# Altium PCB ActuatorCan.PcbDoc
Units mil, origin at the board's own origin, x right, y up, seen from the top; angles counter-clockwise.
Board outline 2415 x 2010 mil, 2 copper layers (Top Layer, Bottom Layer); 65 components, 42 nets, 279 pads, 32 vias.
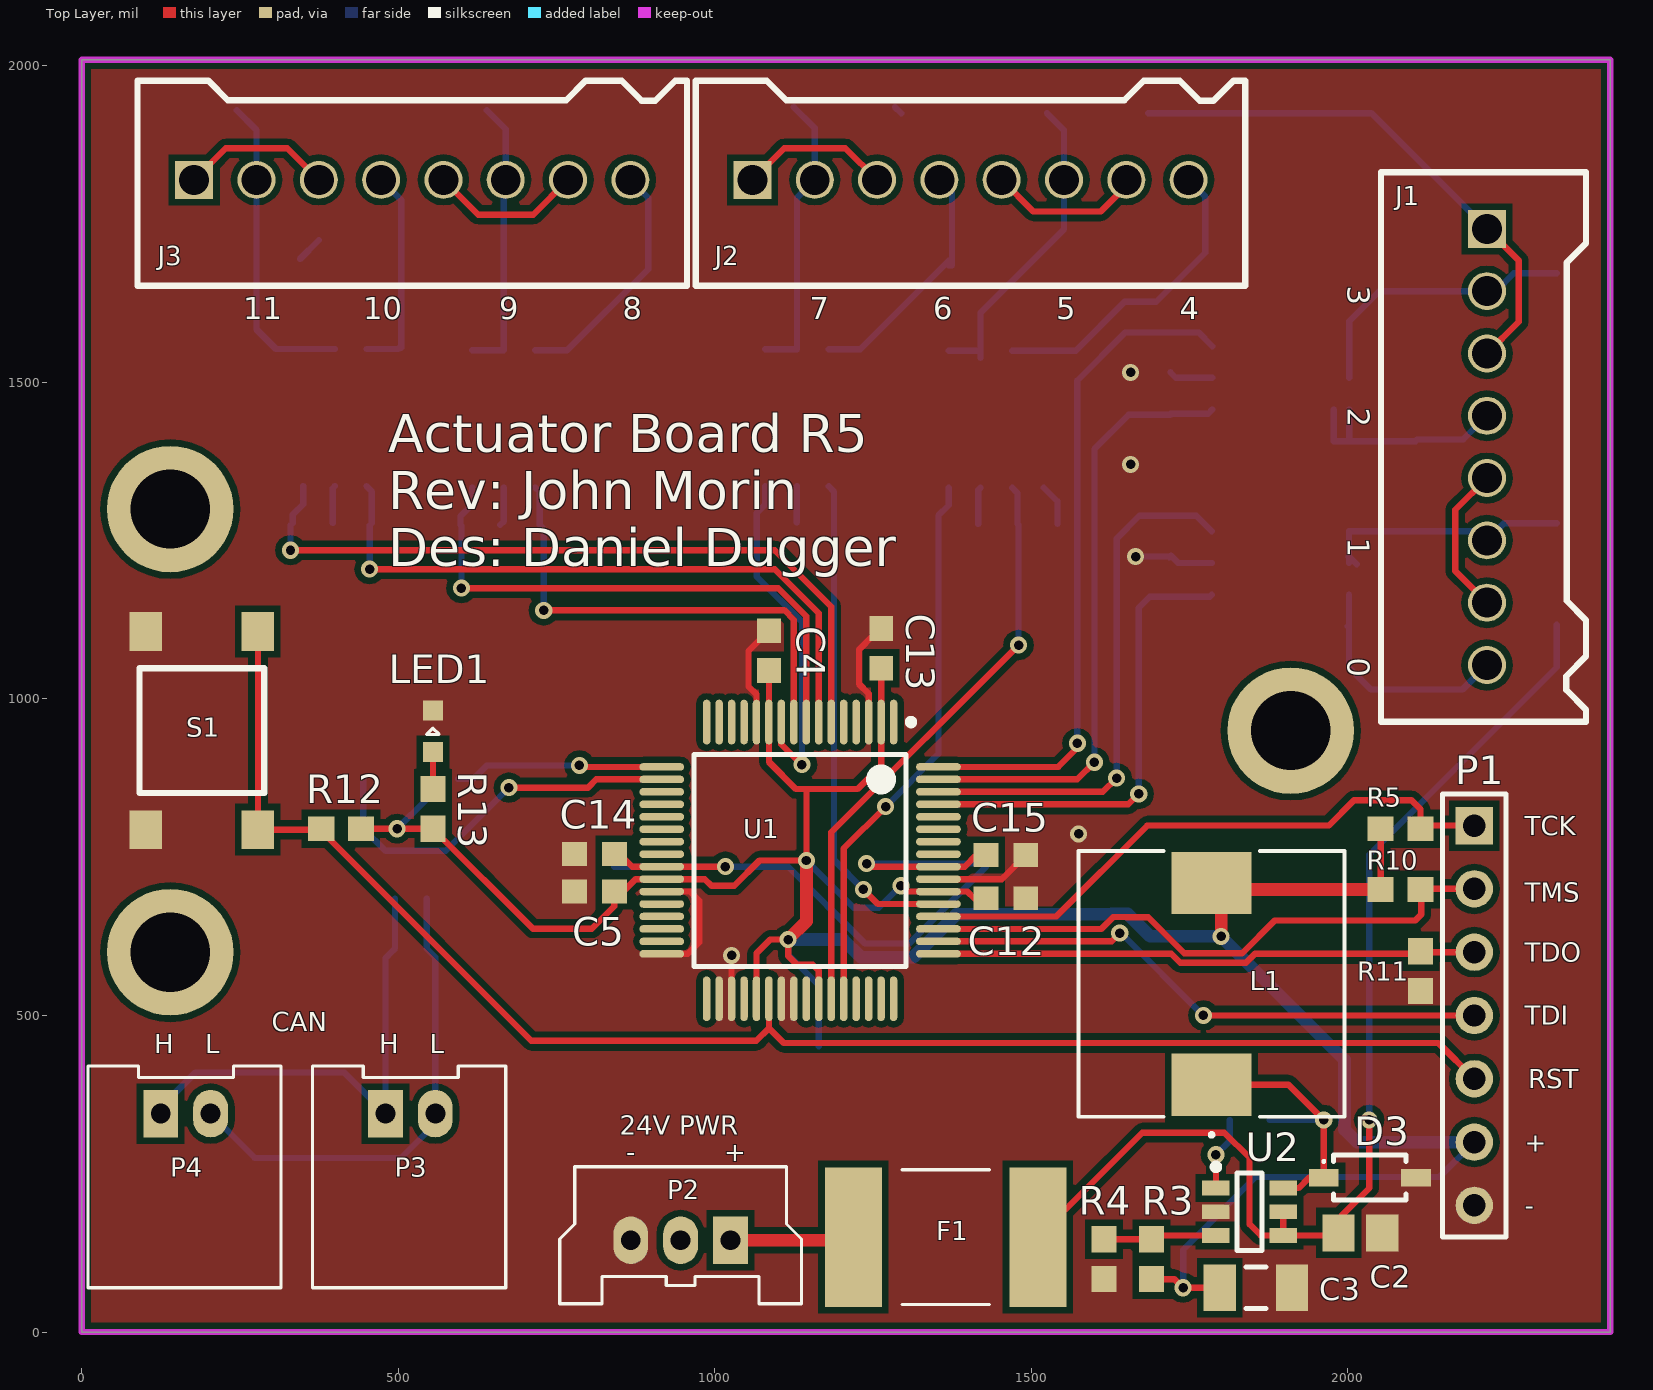
[diagram p0: Top Layer view]
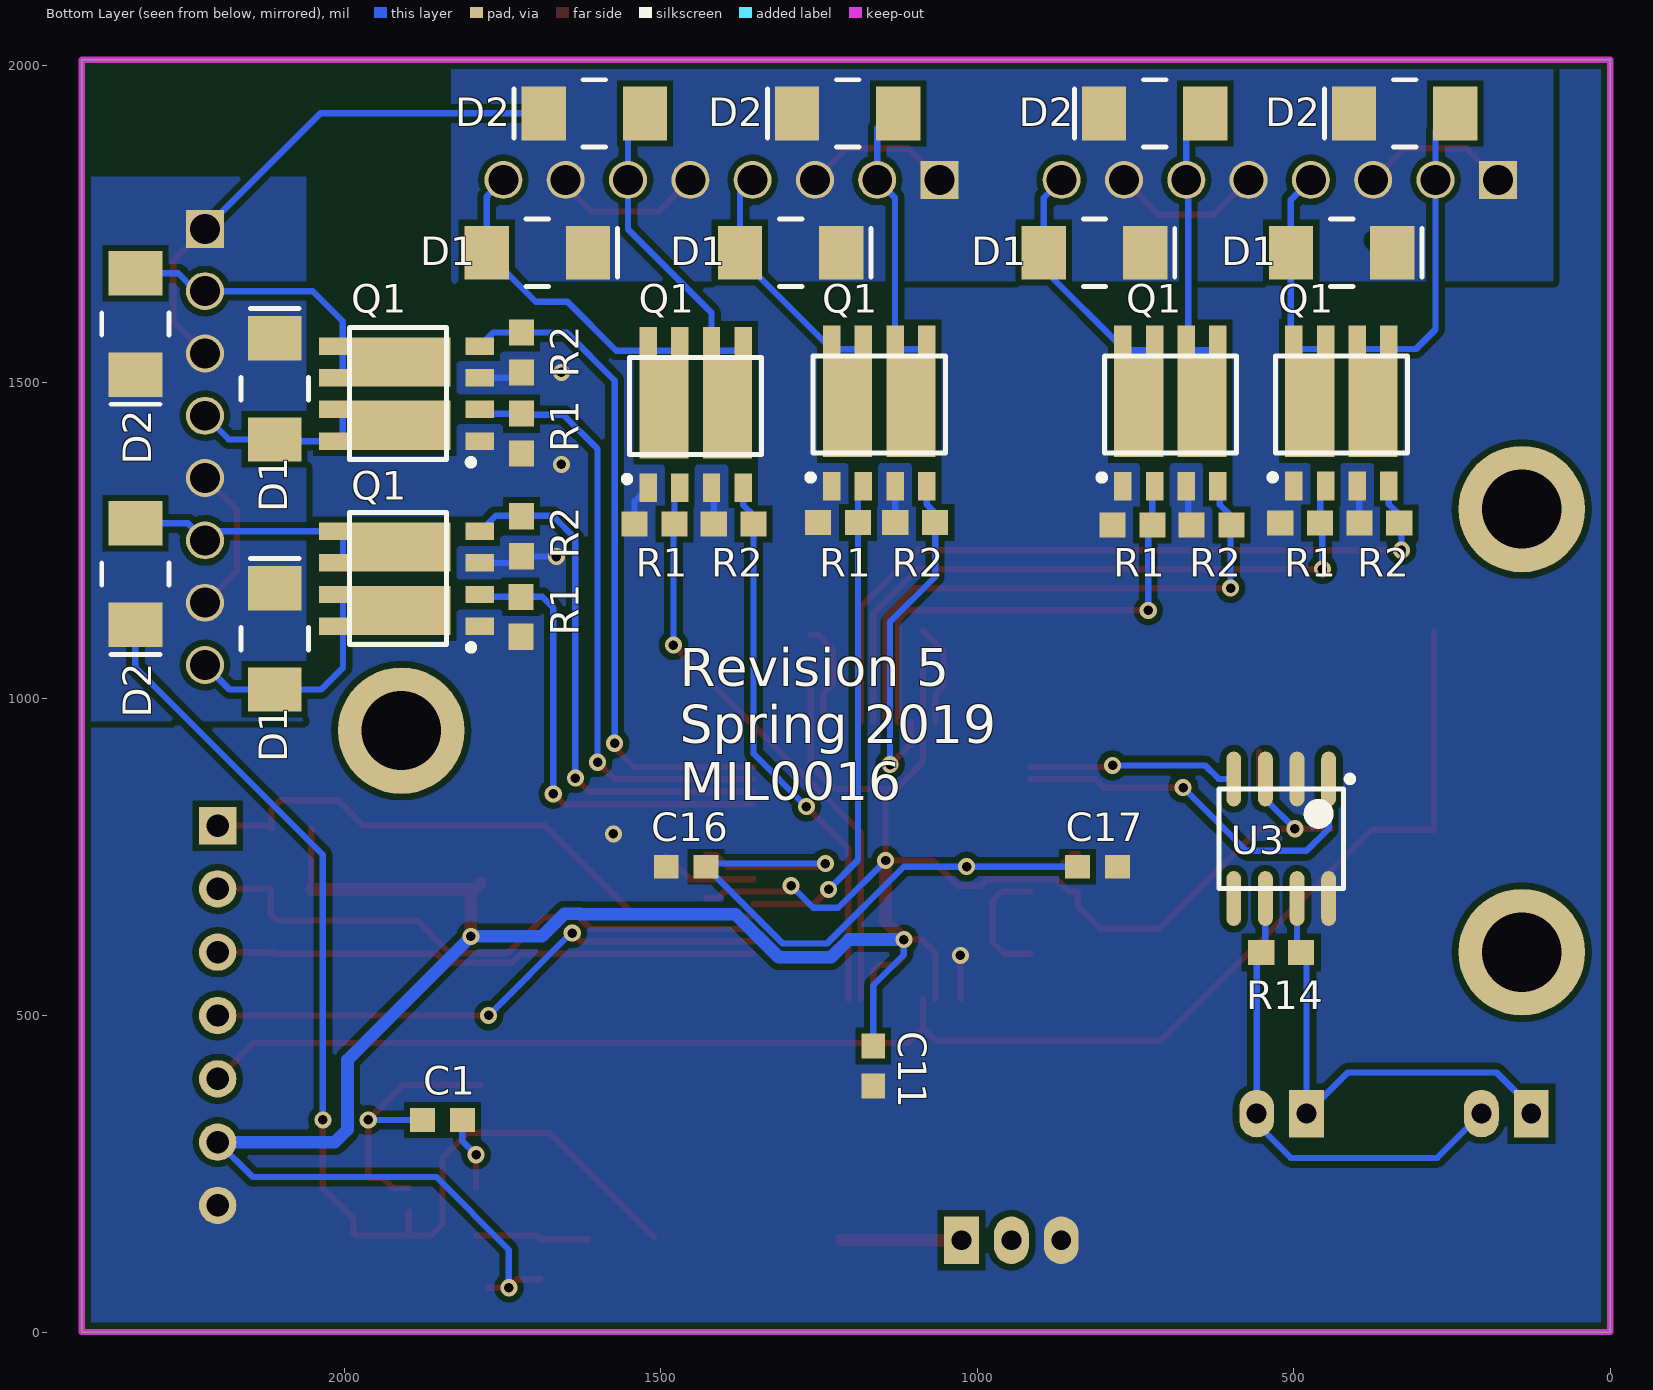
[diagram p1: Bottom Layer view, seen from below]

## Layer stack, top to bottom
Top Solder: solder mask 0.4, Solder Resist, Dk 3.5
Top Layer: signal copper 1.4
Dielectric 1: dielectric 12.6, FR-4, Dk 4.8
Bottom Layer: signal copper 1.4
Bottom Solder: solder mask 0.4, Solder Resist, Dk 3.5

## Board outline
0,0 0,2010 2415,2010 2415,0

## Design rules (kind name [scope] priority, off if disabled: settings)
Clearance [All] p1: gap=10 ignorepadtopadclearanceinfootprint=FALSE except(0: Arc-Hole Track-Hole SMDPad-Hole THPad-Hole Via-Hole Fill-Hole Poly-Hole Region-Hole Text-Hole; 5: Track-Track Track-SMDPad SMDPad-SMDPad; 7: Track-Via)
HoleSize [All] p1: absolutevalues=TRUE maxlimit=150 minlimit=10 maxpercent=80.000 minpercent=20.000
MinimumAnnularRing [All] p1: minimumring=7
MinimumSolderMaskSliver [All] p1: minsoldermaskwidth=1
PolygonConnect [All] p1: connectstyle=Direct reliefconductorwidth=10 reliefentries=4 polygonreliefangle="90 Angle" airgapwidth=10
RoutingVias [All] p1: holewidth=10 width=22 viastyle="Through Hole" minholewidth=10 minwidth=22 maxholewidth=100 maxwidth=150
SilkToSolderMaskClearance [IsPad] p1: minsilkscreentomaskgap=5 clearancetoexposedcopper=TRUE
SolderMaskExpansion [All] p1: expansion=4
Width [All] p1: maxlimit=150 minlimit=8 preferedwidth=10
27 further rules are at their usual default settings.

## Classes and differential pairs
channel class DualDriver: H1 H2 H3 H4 H5 H6
component class H6: D1 D2 Q1 R1 R2
component class H5: D1 D2 Q1 R1 R2
component class H4: D1 D2 Q1 R1 R2
component class H3: D1 D2 Q1 R1 R2
component class H2: D1 D2 Q1 R1 R2
component class H1: D1 D2 Q1 R1 R2
component class ActuatorCan: C1 C2 C3 C4 C5 C11 C12 C13 C14 C15 C16 C17 D3 F1 J1 J2 J3 L1 LED1 P1 P2 P3 P4 R3 R4 R5 R10 R11 R12 R13 R14 S1 U1 U2 U3

## Components (designator, comment, footprint, x,y, rotation, side; value= is the part's Value field where it differs from the comment)
C1 "Cap" CAPC0603 1845,335 r0 bottom value=0.15uF
C2 "Cap" CAPC0805 2020,156.5 r180 top value=2.2uF
C3 "Cap" CAPC1206 1855,70 r180 top value=47uF
C4 "Cap" CAPC0603 1085.79,1076.22 r90 top value=0.1uF
C5 "Cap" CAPC0603 810,695.79 r180 top value=0.1uF
C11 "Cap" CAPC0603 1164.53,420 r270 bottom value=0.1uF
C12 "Cap" CAPC0603 1460,685 r0 top value=0.1uF
C13 "Cap" CAPC0603 1262.95,1080 r90 top value=2.0uF
C14 "Cap" CAPC0603 810,755 r180 top value=0.1uF
C15 "Cap" CAPC0603 1460,753.5 r0 top value=0.1uF
C16 "Cap" CAPC0603 1460,735 r0 bottom value=1.0uF
C17 "Cap" CAPC0603 810,735 r180 bottom value=2.2uF
D1 "Schottky" SS110-TP 424.45,1705 r0 bottom
D1 "Schottky" SS110-TP 815,1705 r0 bottom
D1 "Schottky" SS110-TP 1295,1705 r0 bottom
D1 "Schottky" SS110-TP 1695,1705 r0 bottom
D1 "Schottky" SS110-TP 2110,1490 r270 bottom
D1 "Schottky" SS110-TP 2110,1095 r270 bottom
D2 "Schottky" SS110-TP 1205,1925 r180 bottom
D2 "Schottky" SS110-TP 325,1925 r180 bottom
D2 "Schottky" SS110-TP 720,1925 r180 bottom
D2 "Schottky" SS110-TP 1605,1925 r180 bottom
D2 "Schottky" SS110-TP 2330,1592.36 r90 bottom
D2 "Schottky" SS110-TP 2330,1197.36 r90 bottom
D3 "Schottky" 1N5819HW-7-F 2035,243.9 r0 top
F1 "PTC Fuse" PTC7451X11N 1365,150 r0 top value=1.1A
J1 "MCV_0,5/8-G-2,5" MCV_0,5/8-G-2,5 2220,1742.64 r270 top
J2 "MCV_0,5/8-G-2,5" MCV_0,5/8-G-2,5 1059.72,1820 r0 top
J3 "MCV_0,5/8-G-2,5" MCV_0,5/8-G-2,5 177.87,1820 r0 top
L1 "Inductor" NS10165T150MNA 1785,550 r90 top
LED1 "LED" LED0603 555,948.98 r90 top
P1 "Header 7" HDR1X7 2200,800 r270 top
P2 "3-Pin Molex Sherlock" MOLEX-HDR-1X3-SHERLOCK-VERT 1025,145 r0 top
P3 "2-pin Horz Sherlock" MOLEX-HDR-1X2-SHERLOCK-HORZ 480,345 r180 top
P4 "2-pin Horz Sherlock" MOLEX-HDR-1X2-SHERLOCK-HORZ 125,345 r180 top
Q1 "BUK9K134-100EX" NXP_SOT1205 425,1465.25 r90 bottom
Q1 "BUK9K134-100EX" NXP_SOT1205 695,1465 r90 bottom
Q1 "BUK9K134-100EX" NXP_SOT1205 1155,1465 r90 bottom
Q1 "BUK9K134-100EX" NXP_SOT1205 1445,1462.6 r90 bottom
Q1 "BUK9K134-100EX" NXP_SOT1205 1915.12,1482.36 r0 bottom
Q1 "BUK9K134-100EX" NXP_SOT1205 1915,1190 r0 bottom
R1 "Res" RES0603 490,1277.85 r0 bottom value=10k
R1 "Res" RES0603 755,1275 r0 bottom value=10k
R1 "Res" RES0603 1220,1278.7 r0 bottom value=10k
R1 "Res" RES0603 1510,1276.3 r0 bottom value=10k
R1 "Res" RES0603 1720,1419.29 r270 bottom value=10k
R1 "Res" RES0603 1720.9,1129.84 r270 bottom value=10k
R2 "Res" RES0603 365,1277.85 r0 bottom value=10k
R2 "Res" RES0603 630,1275 r0 bottom value=10k
R2 "Res" RES0603 1098.15,1278.7 r0 bottom value=10k
R2 "Res" RES0603 1385,1276.3 r0 bottom value=10k
R2 "Res" RES0603 1720,1547.36 r270 bottom value=10k
R2 "Res" RES0603 1720,1257.07 r270 bottom value=10k
R3 "Res" RES0603 1690,115 r270 top value=3.4k
R4 "Res" RES0603 1615,115 r270 top value=1.02k
R5 "Res" RES0603 2083.5,795 r0 top value=10k
R10 "Res" RES0603 2083.5,699.04 r0 top value=10k
R11 "Res" RES0603 2115,570 r270 top value=10k
R12 "Res" RES0603 410,795 r180 top value=10k
R13 "Res" RES0603 555,826.5 r90 top value=1k
R14 "Res" RES0603 520,599.21 r180 bottom value=120
S1 "Button" PTS645xxxxSMTR92 190,950 r270 top
U1 "TM4C123GH6PMT7R" PM0064A_N 1135,745 r270 top value=Value
U2 "LMR14203" SOT95P280X110-6N 1845,190 r0 top
U3 "SN65HVD230" SOIC-8pin 520,779.21 r270 bottom

## Footprints (in the part's own frame and the unit in brackets; to place one, negate y for a bottom-side part, rotate by r counter-clockwise, add the part's x,y. Pads: shape width x height; smd on the part's side, far side on the other; paste and mask are expansions set on the pad)
1N5819HW-7-F [mm] "DIODE SCHOTTKY 40V 1A SOD123"
  rect 1.2x0.7 smd: A(1.85,0) C(-1.85,0)
  silkscreen extent -1.9,-0.9 1.45,0.9, body extent -1.42,-0.85 1.43,0.85, height 1.35
CAPC0603 [mm] "Chip Capacitor, 2-Leads, Body 1.60x0.80mm, IPC Medium Density"
  rect 1x0.95 smd: 1(-0.8,0) 2(0.8,0)
  body extent -0.88,-0.48 0.87,0.48, height 0.8
CAPC0805 [mm] "Chip Capacitor, 2-Leads, Body 2.01x1.25mm, IPC Medium Density"
  rect 1.3x1.5 smd: 1(-0.875,0) 2(0.875,0)
  body extent -1.1,-0.72 1.11,0.72, height 1.8
CAPC1206 [mm] "Chip Capacitor, 2-Leads, Body 3.20x1.60mm, IPC Medium Density"
  rect 1.3x1.85 smd: 1(-1.45,0) 2(1.45,0)
  silkscreen extent -0.4,-0.82 0.4,0.82, body extent -1.7,-0.9 1.7,0.9, height 1.8
HDR1X7 [mm] "Connector; Header; 7 Position"
  rect 1.5x1.5 hole 0.9: 1(0,0)
  round 1.5 hole 0.9: 2(2.54,0) 3(5.08,0) 4(7.62,0) 5(10.16,0) 6(12.7,0) 7(15.24,0)
  silkscreen extent -1.27,-1.27 16.51,1.27
LED0603 [mm] "Chip LED, 2-Leads, Body 1.60x0.80mm, IPC Medium Density"
  rect 0.8x0.8 smd: A(-0.825,0) C(0.825,0)
  silkscreen extent -0.13,-0.25 0.12,0.25, body extent -0.88,-0.48 0.87,0.47, height 0.8
MCV_0,5/8-G-2,5 [mil] "CONN TERM BLOCK 2.50MM 8POS"
  rect 60x60 hole 47.24: 1(0,0)
  round 60 hole 47.24: 2(98.43,0) 3(196.85,0) 4(295.28,0) 5(393.7,0) 6(492.13,0) 7(590.55,0) 8(688.98,0)
  silkscreen extent -90,-167 779,156, body extent -87,-165 776,154, height 398
MOLEX-HDR-1X2-SHERLOCK-HORZ [mm]
  rect 1.397x1.905 hole 0.8: 1(0,0)
  oval 1.397x1.905 hole 0.8: 2(-2,0)
  silkscreen extent -4.83,-1.91 2.92,6.98, body extent -4.83,-1.91 2.87,8.59, height 5.54
MOLEX-HDR-1X3-SHERLOCK-VERT [mm]
  rect 1.397x1.905 hole 0.8: 1(0,0)
  oval 1.397x1.905 hole 0.8: 2(-2,0) 3(-4,0)
  silkscreen extent -6.85,-2.55 2.85,2.95, body extent -6.88,-2.57 2.82,2.98, height 8.57
NS10165T150MNA [mil] "FIXED IND 15UH 3.84A 30 MOHM SMD"
  rect 98.5x126 smd paste+0 mask+0: 1(-159.25,0) 2(159.25,0)
  silkscreen extent -241,-210 210,210, body extent -200,-200 200,200, height 256
NXP_SOT1205 [mm] "TSOP, 8-Leads, Body 5.13x4.58mm, Pitch 1.27mm, Thermal Pad 2.00x2.00mm, IPC Medium Density"
  rect 1.15x0.7 smd: 1(-3.275,1.905) 2(-3.275,0.635) 3(-3.275,-0.635) 4(-3.275,-1.905)
  rect 1.9x0.7 smd: 5(2.225,-1.905) 6(2.225,-0.635) 7(2.225,0.635) 8(2.225,1.905)
  rect 4.1x1.97 smd: 6(-0.05,-1.27) 8(-0.05,1.27)
  silkscreen extent -3.05,-2.65 1.95,2.88, body extent -2.35,-2.65 2.35,2.65, height 1.05
PM0064A_N [mm]
  oval 1.8x0.3 smd paste-0.102 mask+0.051: 1(-5.55,3.75) 2(-5.55,3.25) 3(-5.55,2.75) 4(-5.55,2.25) 5(-5.55,1.75) 6(-5.55,1.25) 7(-5.55,0.75) 8(-5.55,0.25) 9(-5.55,-0.25) 10(-5.55,-0.75) 11(-5.55,-1.25) 12(-5.55,-1.75) 13(-5.55,-2.25) 14(-5.55,-2.75) 15(-5.55,-3.25) 16(-5.55,-3.75) 33(5.55,-3.75) 34(5.55,-3.25) 35(5.55,-2.75) 36(5.55,-2.25) 37(5.55,-1.75) 38(5.55,-1.25) 39(5.55,-0.75) 40(5.55,-0.25) 41(5.55,0.25) 42(5.55,0.75) 43(5.55,1.25) 44(5.55,1.75) 45(5.55,2.25) 46(5.55,2.75) 47(5.55,3.25) 48(5.55,3.75)
  oval 0.3x1.8 smd paste-0.102 mask+0.051: 17(-3.75,-5.55) 18(-3.25,-5.55) 19(-2.75,-5.55) 20(-2.25,-5.55) 21(-1.75,-5.55) 22(-1.25,-5.55) 23(-0.75,-5.55) 24(-0.25,-5.55) 25(0.25,-5.55) 26(0.75,-5.55) 27(1.25,-5.55) 28(1.75,-5.55) 29(2.25,-5.55) 30(2.75,-5.55) 31(3.25,-5.55) 32(3.75,-5.55) 49(3.75,5.55) 50(3.25,5.55) 51(2.75,5.55) 52(2.25,5.55) 53(1.75,5.55) 54(1.25,5.55) 55(0.75,5.55) 56(0.25,5.55) 57(-0.25,5.55) 58(-0.75,5.55) 59(-1.25,5.55) 60(-1.75,5.55) 61(-2.25,5.55) 62(-2.75,5.55) 63(-3.25,5.55) 64(-3.75,5.55)
  silkscreen extent -5.67,-4.25 4.25,4.58, body extent -4.19,-4.19 4.19,4.19, height 0.64
PTC7451X11N [mm] "Chip PTC, 2920, 7351 metric 2-Leads, Body 7.36x5.12mm, IPC Medium Density"
  rect 2.3x5.6 smd: 1(-3.7,0) 2(3.7,0)
  silkscreen extent -1.75,-2.7 1.75,2.7, body extent -3.99,-2.72 3.99,2.72, height 1.15
PTS645xxxxSMTR92 [mm] "PTS645 Series SMT 6 mm Tactile Switch"
  rect 1.555x1.3 smd: A(-3.975,2.25) A(3.975,2.25) B(-3.975,-2.25) B(3.975,-2.25)
  silkscreen extent -2.5,-2.5 2.5,2.5, body extent -3,-3 3,3, height 4.5
RES0603 [mm] "Chip Resistor, 2-Leads, Body 1.60x0.80mm, IPC Medium Density"
  rect 1.05x1 smd: 1(-0.8,0) 2(0.8,0)
  body extent -0.88,-0.48 0.87,0.47, height 0.8
SOIC-8pin [mm] "For 296-1345-1-ND"
  oval 2.2x0.6 smd: 1(-2.4,1.905) 2(-2.4,0.635) 3(-2.4,-0.635) 4(-2.4,-1.905) 5(2.4,-1.905) 6(2.4,-0.635) 7(2.4,0.635) 8(2.4,1.905)
  silkscreen extent -2.52,-2.5 2,2.88, body extent -2,-2.5 2,2.5, height 1.75
SOT95P280X110-6N [mm] "SOT23, 6-Leads, Body 2.90x2.80mm, Pitch 0.95mm, IPC Medium Density"
  rect 1.1x0.6 smd: 1(-1.35,0.95) 2(-1.35,0) 3(-1.35,-0.95) 4(1.35,-0.95) 5(1.35,0) 6(1.35,0.95)
  silkscreen extent -1.47,-1.55 0.5,1.92, body extent -0.87,-1.52 0.87,1.53, height 1.1
SS110-TP [mil] "DIODE SCHOTTKY 100V 1A SMA"
  rect 70x85 smd: A(80,0) C(-80,0)
  silkscreen extent -127,-53 18,53, body extent -84,-52 84,52, height 116

## Part data
C1: Supplier Part Number 1=445-13339-1-ND, Supplier 1=Digi-Key
C2: Supplier Part Number 1=445-5968-1-ND, Supplier 1=Digi-Key
C3: Supplier Part Number 1=399-5508-1-ND, Supplier 1=Digi-Key
C4 C5 C11 C12 C13 C14 C15 C16 C17: Supplier Part Number 1=1276-1000-1-ND, Supplier 1=Digi-Key
D1 D1 D1 D1 D1 D1 D2 D2 D2 D2 D2 D2: "Schottky Diode Template", Supplier Part Number 1=B1100-FDICT-ND, Supplier 1=Digi-Key
D3: "Schottky Diode Template", Supplier Part Number 1=1N5819HW-FDICT-ND, Supplier 1=Digi-Key
F1: library part PTC_Fuse, Supplier Part Number 1=507-1744-1-ND, Supplier 1=Digi-Key
J1 J2 J3: "CONN TERM BLOCK 2.50MM 8POS, Vertical, Through-Hole, 4A", Supplier Part Number 1=277-1458-ND, Mating Conn. Digi-Key P/N=277-1436-ND, Supplier 1=Digi-Key
L1: Inductance=15uH, Supplier Part Number 1=445-4574-1-ND, Supplier 1=Digi-Key
LED1: Color=Green, Supplier Part Number 1=754-1122-1-ND, Supplier 1=Digi-Key
P1: "Header, 7-Pin", LatestRevisionDate=17-Jul-2002, LatestRevisionNote="Re-released for DXP Platform.", Publisher="Altium Limited"
P2: library part MOLEX-HDR-1x3-SHERLOCK_VERT, "Header, Molex, 2mm Pitch Sherlock Header, Single Row, Vertical, 3 Circuits, Length 3.3mm, 0353620376"
P3 P4: library part MOLEX-HDR-1x2-SHERLOCK_RA, "Header, Molex, 2mm Pitch Sherlock Header, Single Row, Horizontal, 2 Circuits, Length 3.3mm,  0353630260", Manufacturer="Molex Inc", Manufacturer Part Number=0353630260, Supplier Part Number 1=WM18931-ND, Supplier 1=Digi-Key
Q1 Q1 Q1 Q1 Q1 Q1: "MOSFET DUAL N-CH 100V 8.5A SOT1205", Supplier Part Number 1=568-11631-1-ND, Supplier 1=Digi-Key
R1 R1 R1 R1 R1 R1 R2 R2 R2 R2 R2 R2: Supplier Part Number 1=311-10.0KHRCT-ND, Supplier 1=Digi-Key
R3: Supplier Part Number 1=311-3.40KHRCT-ND, Supplier 1=Digi-Key
R4: Supplier Part Number 1=311-1.02KHRCT-ND, Supplier 1=Digi-Key
R5 R10 R11 R12 R13: Supplier Part Number 1=RMCF0603JT10K0CT-ND, Supplier 1=Digi-Key
S1: "SPST Button", Supplier Part Number 1=CKN9087CT-ND, Supplier 1=Digi-Key
U1: "Imported", Alternate_PartNumber=TM4C123GH6PMT, Manufacturer="Texas Instruments", PartNumber=TM4C123GH6PMTR, CompType=IC, MountType=SMT, PackageReference=PM0064A, PIN_COUNT=64, RefDes=RefDes, RoHS=Y, TYPE=TYPE
U2: "Simple Switcher 42Vin 0.3A Step-Down Voltage Regulator", Supplier Part Number 1=LMR14203XMKE/NOPBCT-ND, Supplier 1=Digi-Key
U3: "3.3V CAN Bus Transceiver"
R14: Supplier 1=Digi-Key

## Free pads (board coordinates)
  round 200 hole 125: ""(140,600) ""(140,1300) ""(1910,950)

## Via types
v1: diameter 27, hole 15, Top Layer to Bottom Layer, tented both sides, 32 vias

## Nets (pads, with @x,y where several pads share a name; then routed paths per layer and width w, separated by ;. In a path a pad name is that pad's centre, name@x,y a point inside that pad or via, vN(x,y) a via of type N, cw(c..) or ccw(c..) an arc to the next point about the centre after c; other vN are vias at no path point)
3V3: C3.2 C4.1 C5.1 C11.1 C12.1 C13.1 L1.2 P1.6 R3.2 R5.1 R10.1 R12.1 R13.1 U1.2 U1.11 U1.26 U1.37 U1.42 U1.54 U3.3 | length 4920.4
  Top Layer w10: R12.1 v1(498.25,795) R13.1 713.04,636.96 805.85,636.96 841.5,672.6 C5.1 855.79,695.79 875,715 916.02,715 U1.26 984.53,715.47 995,705 1031.1,705 1070.95,744.84 v1(1145,744.84) 1145,857.66 ; U1.37 1066.1,598.15 1087.95,620 v1(1116.06,620) 1116.06,593.94 1130,580 1155,580 1164.53,570.47 U1.42 ; C4.1 U1.11 1085.79,900.43 1128.56,857.66 1145,857.66 ; C13.1 U1.2 1262.95,894.93 1225.68,857.66 1145,857.66 ; v1(1294.11,705) 1303.32,695.79 U1.54 1399.21,695.79 1410,685 C12.1 ; R3.2 1726.5,83.5 v1(1740,70) C3.2@1772.91,70 ; R10.1 R5.1
  Top Layer w20: v1(1116.06,620) 1145,648.94 v1(1145,744.84) ; L1.2 1795.21,699.04 R10.1 ; v1(1800,625) L1.2@1800,685
  Bottom Layer w10: v1(498.25,795) 545,841.75 U3.3 ; v1(1116.06,620) 1116.06,596.04 1164.53,547.58 C11.1 ; v1(1145,744.84) 1219.84,670 1259.11,670 v1(1294.11,705) ; v1(1740,70) 1740,130 1855,245 2145,245 P1.6
  Bottom Layer w20: v1(1116.06,620) 1202.94,620 1230.97,591.97 1313.76,591.97 1381.79,660 1626.87,660 1627.37,660.5 1652.63,660.5 1688.13,625 v1(1800,625) 1995,430 1995,319.86 2014.86,300 P1.6
ACT0: D1.A@2110,1015 J1.8 Q1.7@2002.6,1165 Q1.8@1913.03,1140 Q1.8@2002.6,1115 | length 366.5
  Bottom Layer w10: Q1.8@1999.86,1114.84 Q1.8@2001.96,1112.74 ; Q1.7@2001.96,1164.84 2001.96,1114.84 Q1.8@2001.96,1112.74 ; J1.8 2181.34,1015 2110,1015 2036.71,1015 2001.96,1049.75 Q1.8@2001.96,1112.74
ACT1: D2.A@2330,1277.36 J1.6 Q1.5@2002.6,1265 Q1.6@1913.03,1240 Q1.6@2002.6,1215 | length 413
  Bottom Layer w10: Q1.6@2001.67,1224.84 Q1.6@2001.96,1225.14 ; Q1.6@2001.96,1214.84 Q1.6@2001.96,1225.14 ; Q1.6@2014.31,1212.8 Q1.6@2001.96,1225.14 ; D2.A@2330,1277.36 2246.85,1277.36 J1.6 2205.67,1264.84 2001.96,1264.84 Q1.6@2001.96,1225.14
ACT2: D1.A@2110,1410 J1.4 Q1.7@2002.72,1457.36 Q1.8@1913.15,1432.36 Q1.8@2002.72,1407.36 | length 358.9
  Bottom Layer w10: Q1.8@1977.72,1457.36 1977.72,1407.36 Q1.8@2002.72,1407.36 ; Q1.7@2002.72,1457.36 Q1.8@2002.72,1407.36 ; J1.4 2182.64,1410 2110,1410 2107.36,1407.36 Q1.8@2002.72,1407.36
ACT3: D2.A@2330,1672.36 J1.2 Q1.5@2002.72,1557.36 Q1.6@1913.15,1532.36 Q1.6@2002.72,1507.36 | length 448.1
  Bottom Layer w10: Q1.6@2002.72,1507.36 2002.72,1557.36 2002.72,1596.93 2050,1644.21 J1.2 2234.21,1644.21 2262.36,1672.36 D2.A@2330,1672.36
ACT4: D1.A@1775,1705 J2.8 Q1.7@1470,1550.2 Q1.8@1495,1460.63 Q1.8@1520,1550.2 | length 495
  Bottom Layer w10: Q1.7@1470,1550.2 1520,1550.2 1570.2,1550.2 1647.36,1627.36 1697.36,1627.36 1775,1705 1775,1793.7 J2.8
ACT5: D2.A@1525,1925 J2.6 Q1.5@1370,1550.2 Q1.6@1395,1460.63 Q1.6@1420,1550.2 | length 501.8
  Bottom Layer w10: Q1.5@1370,1550.2 Q1.6@1420,1550.2 ; Q1.6@1420,1538.9 1420,1610 1551.85,1741.85 J2.6 1551.85,1898.15 D2.A@1525,1925
ACT6: D1.A@1375,1705 J2.4 Q1.7@1180,1552.6 Q1.8@1205,1463.03 Q1.8@1230,1552.6 | length 396.1
  Bottom Layer w10: Q1.7@1180,1552.6 1230,1552.6 D1.A@1369.61,1692.2 ; J2.4 1375,1800 1375,1685 D1.A@1369.61,1685
ACT7: D2.A@1125,1925 J2.2 Q1.5@1080,1552.6 Q1.6@1105,1463.03 Q1.6@1130,1552.6 | length 457.8
  Bottom Layer w10: Q1.5@1080,1552.6 1130,1552.6 1130,1791.85 J2.2 1158.15,1901.85 D2.A@1125,1935
ACT8: D1.A@895,1705 J3.8 Q1.7@720,1552.6 Q1.8@745,1463.03 Q1.8@770,1552.6 | length 384.1
  Bottom Layer w10: Q1.7@716.85,1550.63 766.85,1550.63 895,1678.78 895,1705 895,1791.85 J3.8
ACT9: D2.A@640,1925 J3.6 Q1.5@620,1552.6 Q1.6@645,1463.03 Q1.6@670,1552.6 | length 443.1
  Bottom Layer w10: Q1.5@616.85,1550.63 666.85,1550.63 666.85,1816.85 J3.6 670,1900 D2.A@640,1930
ACT10: D1.A@504.45,1705 J3.4 Q1.7@450,1552.85 Q1.8@475,1463.28 Q1.8@500,1552.85 | length 335.3
  Bottom Layer w10: Q1.7@450,1552.85 500,1552.85 Q1.8@505,1557.85 ; J3.4 505,1788.15 505,1695 Q1.8@505,1555
ACT11: D2.A@245,1925 J3.2 Q1.5@350,1552.85 Q1.6@375,1463.28 Q1.6@400,1552.85 | length 495.7
  Bottom Layer w10: D2.A@245,1930 276.3,1898.7 J3.2 276.3,1583.7 307.15,1552.85 350,1552.85 Q1.6@400,1552.85
C0: Q1.2@1786.06,1165 R1.1@1720.9,1161.34 U1.61 | length 745
  Top Layer w10: U1.61 1353.63,833.45 1595.17,833.45 1595.3,833.58 1599.76,833.58 1599.85,833.49 1653.49,833.49 v1(1670,850)
  Bottom Layer w10: v1@1673.58,850 v1(1670,850) 1670,1143.82 1687.52,1161.34 1720.9,1161.34 1781.92,1161.34 Q1.2@1785.43,1164.84
C1: Q1.4@1786.06,1265 R2.1@1720,1288.56 U1.62 | length 858.9
  Top Layer w10: U1.62 1613.27,853.27 v1(1635,875) v1@1626.92,875
  Bottom Layer w10: v1@1630,877.99 1632.99,875 v1(1635,875) 1635,1253.49 1671,1289.49 1760.78,1289.49 Q1.4@1785.43,1264.84
C2: Q1.2@1786.18,1457.36 R1.1@1720,1450.79 U1.63 | length 963.9
  Top Layer w10: U1.63 1572.95,872.95 v1(1600,900)
  Bottom Layer w10: v1(1600,900) 1600,1395 1653.86,1448.86 R1.1@1720,1448.86 ; R1.1@1720,1450.79 1779.61,1450.79 Q1.2@1786.18,1457.36
C3: Q1.4@1786.18,1557.36 R2.1@1720,1578.86 U1.64 | length 1065.6
  Top Layer w10: U1.64 1542.64,892.64 1572.95,922.95 v1(1572.95,930)
  Bottom Layer w10: v1(1572.95,930) 1572.95,1502.95 1648.86,1578.86 1720,1578.86 1764.69,1578.86 Q1.4@1786.18,1557.36
C4: Q1.2@1470,1333.66 R1.1@1478.5,1276.3 U1.43 | length 934.6
  Top Layer w10: U1.43 1184.21,789.21 v1(1480,1085)
  Bottom Layer w10: Q1.2@1470,1333.66 1478.5,1325.16 1478.5,1276.3 R1.1@1480,1274.8 ; v1(1480,1085) R1.1@1480,1274.8 ; R1.1@1480,1275.55 R1.1@1480,1274.8
C5: Q1.4@1370,1333.66 R2.1@1353.5,1276.3 U1.44 | length 876
  Top Layer w10: U1.44 1203.9,763.9 v1(1270,830)
  Bottom Layer w10: v1(1270,830) 1353.5,913.5 1353.5,1276.3 1353.5,1289.8 1370,1306.3 Q1.4@1370,1333.66
C6: Q1.2@1180,1336.06 R1.1@1188.5,1278.7 U1.53 | length 788.6
  Top Layer w10: v1(1235,699.04) 1257.94,676.1 U1.53
  Bottom Layer w10: Q1.2@1180,1336.06 1188.5,1327.56 1188.5,1278.7 1188.5,745.54 v1(1235,699.04) v1@1235,699.8
C7: Q1.4@1080,1336.06 R2.1@1066.65,1278.7 U1.10 | length 555.7
  Top Layer w10: U1.10 1105.47,928.73 v1(1137.98,896.22)
  Bottom Layer w10: Q1.4@1080,1336.06 1080,1307.2 1066.65,1293.86 1066.65,1278.7 1066.65,1193.35 1137.98,1122.02 v1(1137.98,896.22)
C8: Q1.2@720,1336.06 R1.1@723.5,1275 U1.9 | length 762.6
  Top Layer w10: v1(730,1140) 1110.47,1140 1125.16,1125.31 U1.9
  Bottom Layer w10: Q1.2@716.85,1334.09 723.5,1327.44 723.5,1275 730,1268.5 v1(730,1140)
C9: Q1.4@620,1336.06 R2.1@598.5,1275 U1.8 | length 897.7
  Top Layer w10: v1(600,1175) 1100.47,1175 1144.84,1130.63 U1.8
  Bottom Layer w10: v1(600,1175) 600,1273.5 598.5,1275 598.5,1288.5 616.85,1306.85 Q1.4@616.85,1334.09
C10: Q1.2@450,1336.31 R1.1@458.5,1277.85 U1.7 | length 1043.7
  Top Layer w10: v1(455,1205) 1095,1205 1164.53,1135.47 U1.7
  Bottom Layer w10: Q1.2@450,1336.31 458.5,1327.81 458.5,1277.85 R1.1@455,1274.34 ; v1(455,1205) R1.1@455,1271.5
C11: Q1.4@350,1336.31 R2.1@333.5,1277.85 U1.6 | length 1180.2
  Top Layer w10: v1(330,1235) 1095,1235 1184.21,1145.79 U1.6
  Bottom Layer w10: v1(330,1235) R2.1@330,1271.5 ; R2.1@330,1274.34 333.5,1277.85 333.5,1291.35 350,1307.85 Q1.4@350,1336.31
CAN_RX: U1.17 U3.4 | length 331.3
  Top Layer w10: v1(786.5,895) 788.86,892.64 U1.17
  Bottom Layer w10: U3.4 618.7,873.7 640,895 v1(786.5,895)
CAN_TX: U1.18 U3.1 | length 611.5
  Top Layer w10: v1(675,860) 800,860 812.95,872.95 U1.18
  Bottom Layer w10: U3.1 445,795 480,760 575,760 v1(675,860)
CANH: P3.1 P4.1 R14.2 U3.7 | length 774.8
  Bottom Layer w10: P4.1 115,345 180,410 415,410 P3.1 480,590.71 R14.2 495,605.71 U3.7
CANL: P3.2 P4.2 R14.1 U3.6 | length 767.9
  Bottom Layer w10: P4.2 273.74,275 505,275 558.74,328.74 P3.2 558.74,591.97 R14.1 545,605.71 U3.6
CB: C1.1 U2.1 | length 116.6
  Top Layer w10: U2.1 v1(1791.85,280)
  Bottom Layer w10: v1(1791.85,280) 1813.5,301.65 C1.1
FB: R3.1 R4.1 U2.3 | length 179.4
  Top Layer w10: R4.1 R3.1 1696.1,152.6 U2.3
GND: C2.1 C3.1 C4.2 C5.2 C11.2 C12.2 C13.2 C14.2 C15.2 C16.2 C17.2 D3.A LED1.C P1.7 P2.3 Q1.1 Q1.3 R1.2 R2.2 R4.2 R11.2 S1.B U1.3 U1.12 U1.27 U1.32 U1.34 U1.35 U1.39 U1.40 U1.55 U2.2 U3.2 U3.8 | length 1248.9
  Top Layer w10: U1.32 957.36,597.36 975.9,615.9 975.9,681.34 961.45,695.79 U1.27 ; U1.35 v1(1026.73,595) ; U1.12 1066.1,1007.21 1053.37,1019.95 1053.37,1075.3 C4.2 ; U1.3 1243.27,1008.37 1228.05,1023.59 1228.05,1078.05 1251.5,1101.5 C13.2@1262.95,1101.5 ; U1.55 1453.46,715.47 C15.2
  Bottom Layer w10: R2.2@396.5,1277.85 396.5,1332.81 Q1.3@400,1336.31 ; R2.2@661.5,1275 666.85,1280.35 Q1.3@666.85,1334.09 ; R2.2@1129.65,1278.7 1129.65,1335.71 Q1.3@1130,1336.06 ; R2.2@1416.5,1276.3 1416.5,1330.16 Q1.3@1420,1333.66 ; Q1.1@1520,1333.66 1541.5,1312.17 R1.2@1541.5,1276.3 ; v1(1665,1225) 1717.13,1225 1718.27,1223.86 1720.9,1226.5 1732.55,1214.84 Q1.3@1785.43,1214.84 ; R2.2@1720,1515.87 1728.5,1507.36 Q1.3@1786.18,1507.36
  other v1: 1575,786.94 1657.09,1370.44 1657.09,1515.87
NetLED1_A: LED1.A R13.2 | length 58.5
  Top Layer w10: R13.2 LED1.A
RST_N: P1.5 R12.2 S1.A U1.38 | length 2460.5
  Top Layer w10: S1.A@278.58,1106.5 278.58,793.5 377.01,793.5 710.51,460 1065.79,460 1085.79,480 ; U1.38 1085.79,480 ; P1.5 2143.5,456.5 1109.29,456.5 1085.79,480
SW: C1.2 D3.C L1.1 U2.6 | length 447.9
  Top Layer w10: L1.1 1906.42,390.75 v1(1962.17,335) D3.C 1938.9,243.9 1922.4,227.4 U2.6
  Bottom Layer w10: C1.2 v1(1962.17,335)
TCK/SWCLK: P1.1 R5.2 U1.52 | length 961.4
  Top Layer w10: U1.52 1353.62,656.3 1539.88,656.3 1683.58,800 1970,800 2010,840 2100.87,840 2115,825.87 R5.2 2120,800 P1.1
TDI: P1.4 U1.50 | length 908.6
  Top Layer w10: U1.50 1627.05,617.05 v1(1640,630) ; v1(1772.05,500) P1.4
  Bottom Layer w10: v1(1640,630) 1640,632.05 v1(1772.05,500)
TDO/SWO: P1.3 R11.1 U1.49 | length 860.6
  Top Layer w10: U1.49 1721.42,597.36 1735.64,583.15 1839.36,583.15 1853.58,597.36 2110.87,597.36 R11.1 2116.5,600 P1.3
TMS/SWDIO: P1.2 R10.2 U1.51 | length 944
  Top Layer w10: U1.51 1610.67,636.73 1629.44,655.5 1650.56,655.5 1651.06,655 1685,655 1741.85,598.15 1833.15,598.15 1885,650 2106.5,650 2115.96,659.46 2115.96,700 P1.2
VDDC: C14.1 C15.1 C16.1 C17.1 U1.25 U1.56 | length 1259.7
  Top Layer w10: C14.1 850,755 869.84,735.16 U1.25 916.65,735 916.81,735.16 v1(1016.89,735.16) ; v1(1240,740) 1244.84,735.16 U1.56 1395,735.16 1413.35,753.5 C15.1
  Bottom Layer w10: C17.1 841.65,735.16 v1(1016.89,735.16) 1116.06,735.16 1237.44,613.78 1307.28,613.78 C16.1@1428.03,734.53 ; v1(1240,740) 1422.56,740 C16.1@1428.03,734.53 ; C16.1 C16.1@1428.03,734.53
Vfused: C2.2 D1.C D2.C F1.2 J1.1 J1.3 J1.5 J1.7 J2.1 J2.3 J2.5 J2.7 J3.1 J3.3 J3.5 J3.7 U2.4 U2.5 | length 3920.7
  Top Layer w10: J3.1 227.87,1870 324.72,1870 J3.3 ; J3.5 626.57,1765 713.43,1765 J3.7 ; J2.1 1109.72,1870 1206.57,1870 J2.3 ; J2.5 1503.43,1770 1610,1770 1650.28,1810.28 J2.7 ; F1.2 1675.67,315 1805,315 1845,275 1845,170 1862.4,152.6 U2.4 ; U2.5 U2.4 ; v1(2033.9,335) 2033.9,227.4 1985.55,179.06 C2.2 1981.65,152.6 U2.4 ; J1.7 2170,1202.09 2170,1298.94 J1.5 ; J1.3 2270,1595.79 2270,1692.64 J1.1
  Bottom Layer w10: D1.C@345,1695 D1.C@374.72,1724.72 ; D2.C@1285,1935 D2.C@1295,1925 ; D2.C@1685,1925 2037.64,1925 J1.1 ; v1(2033.9,335) 2033.9,753.9 2330,1050 D2.C@2330,1117.36
Vhigh: F1.1 P2.1 | length 196.4
  Top Layer w10: F1.1@1214.33,145 F1.1
  Top Layer w20: P2.1 F1.1@1214.33,145
pads on no net: P2.2 U1.1 U1.4 U1.5 U1.13 U1.14 U1.15 U1.16 U1.19 U1.20 U1.21 U1.22 U1.23 U1.24 U1.28 U1.29 U1.30 U1.31 U1.33 U1.36 U1.41 U1.45 U1.46 U1.47 U1.48 U1.57 U1.58 U1.59 U1.60 U3.5

## Polygon pours and split planes (outlines as drawn)
GND on Bottom Layer "Bottom Layer-GND" (solid, remove dead copper, pour order 4): 0,2010 0,0 2415,0 2415,2010
Vfused on Bottom Layer "Bottom Layer-Vfused" (solid, pour order 2): 90,1660 90,2010 1830.87,2010 1830.87,1660 1825.87,1655 1820.87,1660
Vfused on Bottom Layer "Bottom Layer-Vfused 1" (solid, pour order 0): 2060,1825 2415,1825 2415,965 2060,965 2055,970 2060,975
GND on Top Layer "Top Layer-GND" (solid, remove dead copper, pour order 6): 0,1982.5 0,0 2415,0 2415,2010 0,2010

## Keep-outs
Keep-Out Layer:
  the board outline again, w10

## Silkscreen, mask and mechanical layers (free items; w line width, h text height)
Top Overlay:
  text "3" at 2000,1652.68 h35 r270
  text "11" at 255,1600 h35
  text "10" at 445,1600 h35
  text "9" at 660,1600 h35
  text "8" at 855,1600 h35
  text "7" at 1150,1600 h35
  text "6" at 1345,1600 h35
  text "5" at 1540,1600 h35
  text "4" at 1735,1600 h35
  text "2" at 2000,1460 h35 r270
  text "1" at 2000,1255 h35 r270
  text "Actuator Board R5 / Rev: John Morin / Des: Daniel Dugger" at 484.75,1210 h60
  text "0" at 2000,1065 h35 r270
  text "TCK" at 2280,785 h30
  text "TMS" at 2280,680 h30
  text "TDO" at 2280,585 h30
  text "TDI" at 2280,485 h30
  text "CAN" at 300,475 h30
  text "H" at 115,440 h30
  text "L" at 195,440 h30
  text "H" at 470,440 h30
  text "L" at 550,440 h30
  text "RST" at 2285,385 h30
  text "24V PWR" at 850,311.5 h30
  text "+" at 2280,285 h30
  text "-" at 860,270 h30
  text "+" at 1015,270 h30
  text "-" at 2280,185 h30
Bottom Overlay:
  text "Revision 5 / Spring 2019 / MIL0016" at 1470,840 h60
BO:
  lines w10: 5,0 2415,0 2415,2010 5,2010 5,0